# Allegro board SHT85-Demo.brd
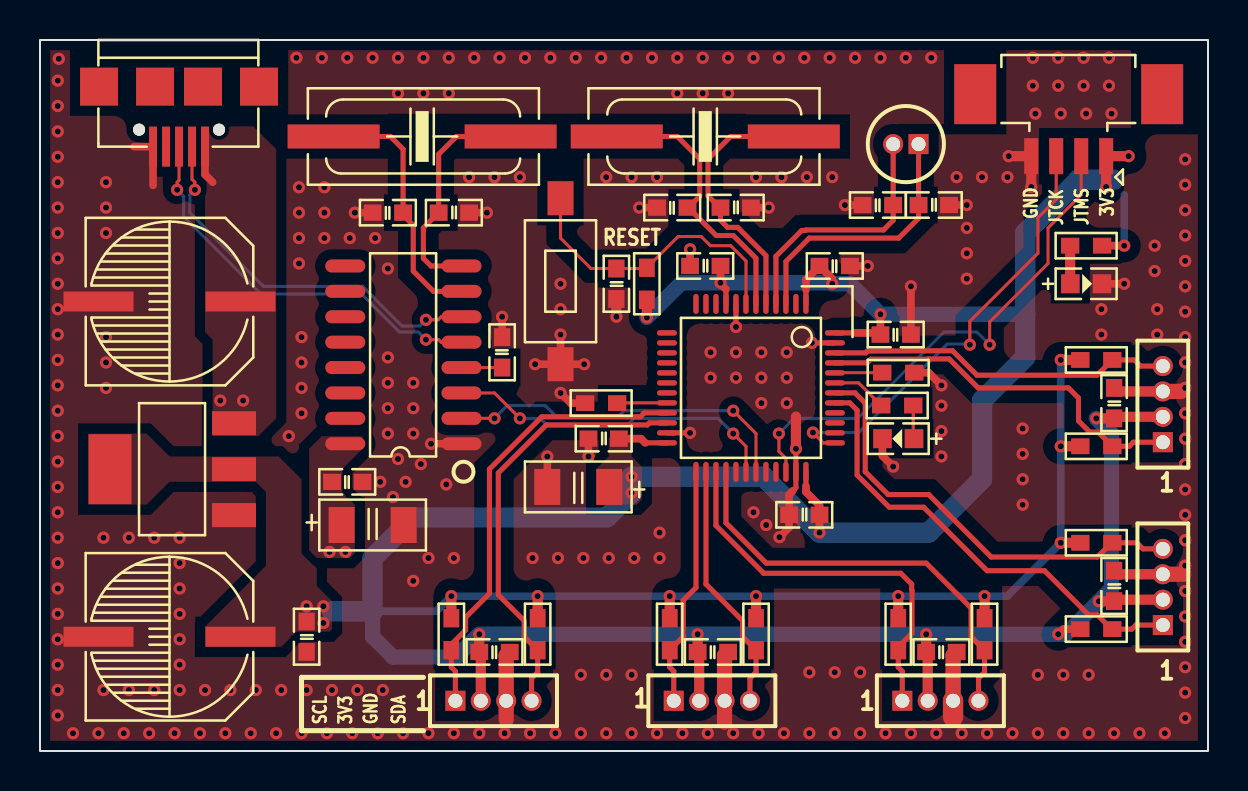
[diagram p0: board, top side]
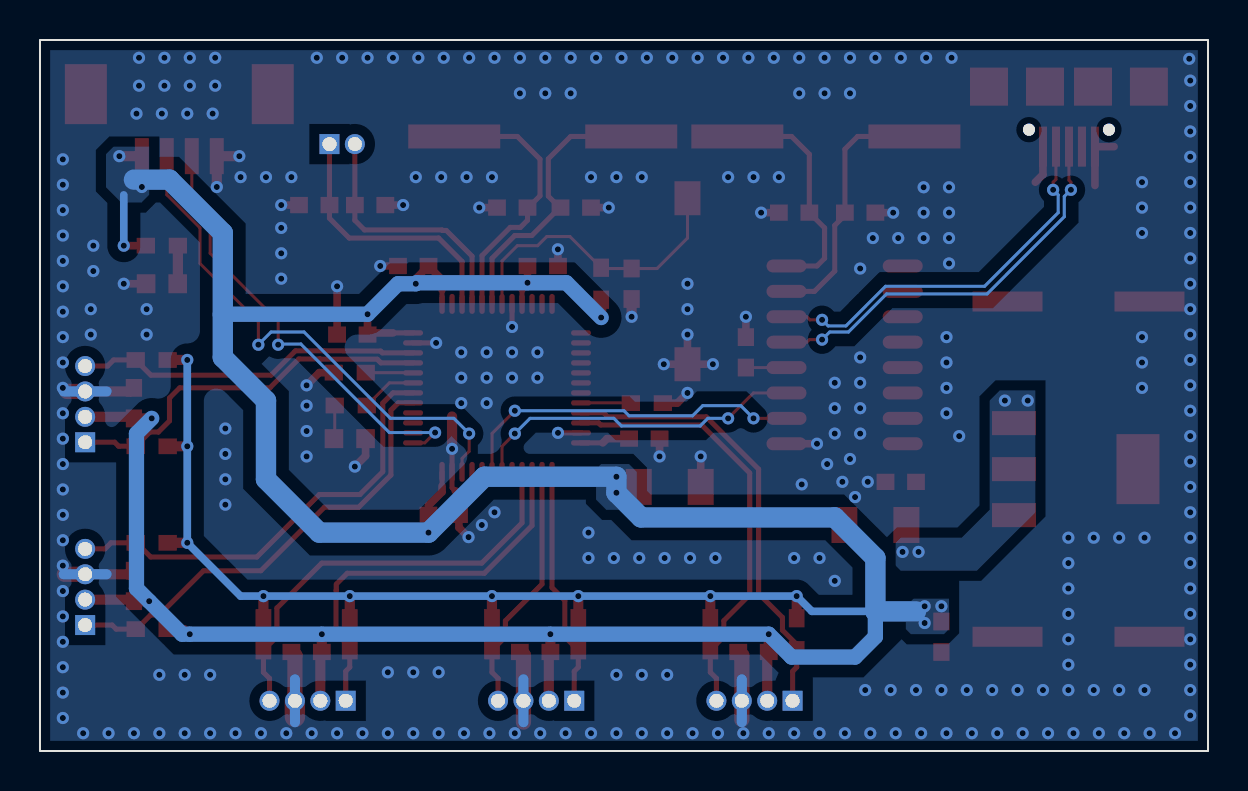
[diagram p1: board, bottom side, seen from below]

Outline 58.42 x 35.56 mm; copper layers: TOP, BOTTOM. Coordinates in mm from the lower left corner of the outline.
Outline path: rectangle 0,0 58.42,35.56

## Placement (name value [footprint] x y rotation side)
C1  0.1uF  [C0603]  28.83 23.37 90 top
C2  22pF  [C0603]  34.8 27.18 180 top
C3  22pF  [C0603]  31.62 27.18 0 top
C4  10pF/NC  [C0603]  44.7 27.3 180 top
C5  10pF/NC  [C0603]  41.91 27.3 0 top
C6  0.1uF  [C0603]  53.72 8.26 90 top
C7  0.1uF  [C0603]  53.72 17.4 90 top
C8  0.1uF  [C0603]  22.73 4.95 0 top
C9  0.1uF  [C0603]  33.66 4.95 0 top
C10  0.1uF  [C0603]  45.09 4.95 0 top
C11  220uF  [C_SMD_8X10]  6.48 22.48 180 top
C12  220uF  [C_SMD_8X10]  6.48 5.71 180 top
C13  0.1uF  [C0603]  13.34 5.71 90 top
C14  0.1uF  [C0603]  33.27 24.26 180 top
C15  0.1uF  [C0603]  39.75 24.26 0 top
C16  0.1uF  [C0603]  42.8 20.83 0 top
C17  0.1uF  [C0603]  38.23 11.81 180 top
C18  0.1uF  [C0603]  28.19 15.62 180 top
C19  10uF  [TA3216]  26.92 13.21 180 top
C24  10uF  [TA3216]  16.64 11.3 0 top
C25  0.1uF  [C0603]  15.37 13.46 0 top
C26  103  [C0603]  23.11 19.94 270 top
C27  22pF  [C0603]  17.4 26.92 0 top
C28  22pF  [C0603]  20.7 26.92 180 top
D1  LED  [LED0603]  42.93 15.62 180 top
D2  LED  [LED0603]  52.32 23.37 0 top
J1  SLAVE0_CON  [SIP-4-1R27]  56.16 6.3 90 top
J2  SLAVE1_CON  [SIP-4-1R27]  56.16 15.44 90 top
J3  SLAVE2_CON  [SIP-4-1R27]  20.78 2.51 0 top
J4  SLAVE3_CON  [SIP-4-1R27]  31.7 2.51 0 top
J5  SLAVE4_CON  [SIP-4-1R27]  43.13 2.51 0 top
J6  SWD  [1_25_PWT_4P]  51.38 32.48 180 top
KEY1  RESET  [BUTTON_2P_SMD]  26.04 23.5 90 top
R1  10K  [R0603]  42.93 18.92 0 top
R2  10K  [R0603]  30.35 23.37 90 top
R3  10K  [R0603]  28.07 17.4 180 top
R4  4K7  [R0603]  52.83 10.41 0 top
R5  4K7  [R0603]  52.83 6.1 0 top
R6  4K7  [R0603]  52.83 19.56 0 top
R7  4K7  [R0603]  52.83 15.24 0 top
R8  4K7  [R0603]  24.89 5.84 270 top
R9  4K7  [R0603]  20.57 5.84 270 top
R10  4K7  [R0603]  35.81 5.84 270 top
R11  4K7  [R0603]  31.5 5.84 270 top
R12  4K7  [R0603]  47.24 5.84 270 top
R13  4K7  [R0603]  42.93 5.84 270 top
R14  1K  [R0603]  42.88 17.28 0 top
R15  1K  [R0603]  52.32 25.27 180 top
U1  STM32F103C8T6  [LQFP-48]  35.56 18.16 270 top
U2  AMS1117-3V3  [SOT-223]  6.6 14.1 90 top
U3  CH340G  [SOIC-16]  21.08 15.37 180 top
USB1  USB_B_MICRO  [USB-MICRO-5P]  8.26 30.23 180 top
X1  8MHz  [CRY_HC_49U_SMD]  33.27 30.73 180 top
X2  32.768K  [32R768K_DIP]  43.94 30.35 180 top
X3  12MHz  [CRY_HC_49U_SMD]  19.11 30.73 0 top

## Library data of the parts
C1-C10 C13-C18 C25-C28 = CAP NP
C11 C12 = CAP POL
C19 C24 = CAP TAC
D1 D2 = LED
J1-J6 = 4 HEADER
KEY1 = KEY_2
R1-R15 = R
U1 = STM32F103C8T6
U2 = AMS1117-3V3
U3 = CH340G
USB1 = USB_B_MINI
X1-X3 = XTAL

## Footprints (pads in the part's own frame, mm; a bottom-side part is the same pattern mirrored in y, then rotated)
1_25_PWT_4P
  rect 2.1x3 smd: (-4.742,-0.369) (4.608,-0.369)
  rect 0.7x1.8 smd: 1(-1.94,2.731) 2(-0.694,2.731) 3(0.558,2.731) 4(1.808,2.731)
32R768K_DIP
  rect 1x1 hole 0.7: 1(0,0)
  round 1 hole 0.7: 2(1.27,0)
BUTTON_2P_SMD
  rect 1.7x1.3 smd: 1(-4.15,0) 2(4.15,0)
C0603
  rect 0.889x0.813 smd: 1(-0.762,0) 2(0.762,0)
C_SMD_8X10
  rect 3.5x1 smd: 1(-3.55,0) 2(3.55,0)
CRY_HC_49U_SMD
  rect 4.6x1.2 smd: 1(-4.428,0) 2(4.428,0)
LED0603
  rect 0.93x0.95 smd: 1(-0.79,0) 2(0.79,0)
LQFP-48
  oval 1x0.27 smd: 1(-4.2,2.75) 2(-4.2,2.25) 3(-4.2,1.75) 4(-4.2,1.25) 5(-4.2,0.75) 6(-4.2,0.25) 7(-4.2,-0.25) 8(-4.2,-0.75) 9(-4.2,-1.25) 10(-4.2,-1.75) 11(-4.2,-2.25) 12(-4.2,-2.75) 25(4.2,-2.75) 26(4.2,-2.25) 27(4.2,-1.75) 28(4.2,-1.25) 29(4.2,-0.75) 30(4.2,-0.25) 31(4.2,0.25) 32(4.2,0.75) 33(4.2,1.25) 34(4.2,1.75) 35(4.2,2.25) 36(4.2,2.75)
  oval 0.27x1 smd: 13(-2.75,-4.2) 14(-2.25,-4.2) 15(-1.75,-4.2) 16(-1.25,-4.2) 17(-0.75,-4.2) 18(-0.25,-4.2) 19(0.25,-4.2) 20(0.75,-4.2) 21(1.25,-4.2) 22(1.75,-4.2) 23(2.25,-4.2) 24(2.75,-4.2) 37(2.75,4.2) 38(2.25,4.2) 39(1.75,4.2) 40(1.25,4.2) 41(0.75,4.2) 42(0.25,4.2) 43(-0.25,4.2) 44(-0.75,4.2) 45(-1.25,4.2) 46(-1.75,4.2) 47(-2.25,4.2) 48(-2.75,4.2)
R0603
  rect 0.914x0.787 smd: 1(-0.8,0) 2(0.8,0)
SIP-4-1R27
  rect 1x1 hole 0.7: 1(0,0)
  round 1 hole 0.7: 2(1.27,0) 3(2.54,0) 4(3.81,0)
SOIC-16
  oval 2x0.65 smd: 1(0,0) 2(0,-1.27) 3(0,-2.54) 4(0,-3.81) 5(0,-5.08) 6(0,-6.35) 7(0,-7.62) 8(0,-8.89) 9(5.813,-8.89) 10(5.813,-7.62) 11(5.813,-6.35) 12(5.813,-5.08) 13(5.813,-3.81) 14(5.813,-2.54) 15(5.813,-1.27) 16(5.813,0)
SOT-223
  rect 1.2x2.2 smd: 1(-2.3,-3.1) 2(0,-3.1) 3(2.3,-3.1)
  rect 3.5x2.15 smd: 4(0,3.1)
TA3216
  rect 1.3x1.8 smd: 1(-1.55,0) 2(1.55,0)
USB-MICRO-5P
  rect 1.9x1.9 smd: (-2.7,-3) (0.1,-3) (2.5,-3) (5.3,-3)
  round 0.6 hole 0.6 unplated: (-0.7,-0.85) (3.3,-0.85)
  rect 0.4x2 smd: 1(0,0) 2(0.65,0) 3(1.3,0) 4(1.95,0) 5(2.6,0)

## Nets
GND: C1.1 C2.1 C3.1 C4.1 C5.1 C6.2 C7.2 C8.2 C9.2 C10.2 C11.2 C12.2 C13.1 C14.2 C15.2 C16.2 C17.2 C18.2 C19.2 C24.2 C25.2 C26.1 C27.1 C28.1 D1.2(K) D2.2(K) J1.3 J2.3 J3.3 J4.3 J5.3 J6.4 KEY1.1 R1.2 R3.2 U1.8(VSSA) U1.23(VSS_1) U1.35(VSS_2) U1.47(VSS_3) U2.1(GND) U3.1(GND) USB1.5(GND)
VCC_3V3: C6.1 C7.1 C8.1 C9.1 C10.1 C12.1 C13.2 C14.1 C15.1 C16.1 C17.1 C18.1 C19.1 J1.2 J2.2 J3.2 J4.2 J5.2 J6.1 R2.1 R4.1 R5.1 R6.1 R7.1 R8.1 R9.1 R10.1 R11.1 R12.1 R13.1 R15.1 U1.1(VBAT) U1.9(VDDA) U1.24(VDD_1) U1.36(VDD_2) U1.48(VDD_3) U2.2(OUT0) U2.4(OUT1)
VCC_USB: C11.1 C24.1 C25.1 U2.3(IN) U3.16(VCC) USB1.1(VCC)
D+: U3.5(D+) USB1.3(D+)
D-: U3.6(D-) USB1.2(D-)
I2C0_SCL: J1.1 R5.2 U1.41(PB5)
I2C0_SDA: J1.4 R4.2 U1.42(PB6)
I2C1_SCL: J2.1 R7.2 U1.45(PB8)
I2C1_SDA: J2.4 R6.2 U1.46(PB9)
I2C2_SCL: J3.1 R9.2 U1.21(PB10)
I2C2_SDA: J3.4 R8.2 U1.22(PB11)
I2C3_SCL: J4.1 R11.2 U1.25(PB12)
I2C3_SDA: J4.4 R10.2 U1.26(PB13)
I2C4_SCL: J5.1 R13.2 U1.27(PB14)
I2C4_SDA: J5.4 R12.2 U1.28(PB15)
LED0: R14.1 U1.43(PB7)
NRST: C1.2 KEY1.2 R2.2 U1.7(NRST)
OSC_IN: C2.2 U1.5(PD0-OSC_IN) X1.1(X1)
OSC_OUT: C3.2 U1.6(PD1) X1.2(X2)
RTC_OSCIN: C4.2 U1.3(PC14-OSC32_IN) X2.1(X1)
RTC_OSCOUT: C5.2 U1.4(PC15-OSC32_OUT) X2.2(X2)
SWCLK: J6.3 U1.37(PA14)
SWDIO: J6.2 U1.34(PA13)
USART1_RX: U1.31(PA10) U3.2(TXD)
USART1_TX: U1.30(PA9) U3.3(RXD)
N00282: R1.1 U1.44(BOOT0)
N02694: R3.1 U1.20(PB2)
N12358: D1.1(A) R14.2
N13133: D2.1(A) R15.2
N27803: C28.2 U3.8(XO) X3.2(X2)
N27807: C27.2 U3.7(XI) X3.1(X1)
N275633: C26.2 U3.4(V3)

Pads without a net: U1 2 10 11 12 13 14 15 16 17 18 19 29 32 33 38 39 40; U3 9 10 11 12 13 14 15; USB1 4

## Via types
v1: diameter 0.61, hole 0.305, TOP to BOTTOM, 327 vias

## Routing (per net, layer and track width the routed paths; a pad name or vN(x,y) marks a point on that pad's centre or on a via; arc(x,y) is an arc through that point)
GND: length 68.5
  TOP w0.254: U1.23 v1(32.51,15.91) ; U1.47 v1(38.61,20.41) ; 37.66,13.02 37.81,13.17 U1.35 v1(37.81,15.11) ; U1.8 v1(34.81,21.21)
  TOP w0.381: v1(36.99,10.7) 37.47,11.18 C17.2 37.47,12.83 37.66,13.02 ; C14.2 32.51,25.09 v1(32.52,25.09) ; C19.2 v1(25.37,14.73) ; v1(45.09,18.29) 44.45,18.92 R1.2 ; 5.66,28.29 USB1.5 4.7,30.23 ; KEY1.1 v1(26.04,20.83) ; KEY1.1 v1(24.77,19.34) ; KEY1.1 v1(27.22,19.34) ; C16.2 v1(43.56,23.24) ; C5.1 v1(40.26,27.3) ; C4.1 v1(46.35,27.3) ; C18.2 v1(27.43,14.73) ; C2.1 v1(36.45,27.18) ; D1.2 42.14,14.76 v1(42.67,14.22) ; v1(26.04,17.91) 26.54,17.4 R3.2 ; C27.1 v1(15.75,26.92) ; C28.1 v1(22.35,26.92) ; D2.2 v1(54.23,23.37) ; C3.1 v1(29.97,27.18) ; C26.1 v1(23.11,21.72) ; U3.1 v1(19.56,15.37) ; C15.2 v1(41.4,24.26)
  TOP w0.508: 53.72,9.02 53.9,8.84 J1.3 56.29,8.84 ; J2.3 53.9,17.98 C7.2 ; v1(49.58,28.21) J6.4 v1(48.45,29.75) ; C1.1 v1(28.83,21.72) ; v1(37.81,15.11) 37.81,16.73
  TOP w0.762: C10.2 45.67,4.78 J5.3 ; J2.3 57.07,17.98 ; C9.2 34.24,4.78 J4.3 34.24,1.45 ; 57.2,8.84 56.29,8.84 ; 23.32,1.57 J3.3 23.32,4.78 C8.2
  TOP w1.016: J5.3 45.67,1.7
  BOTTOM w0.508: 55.09,8.84 J1.3 57.23,8.84 ; 23.32,1.44 J3.3 23.32,3.58 ; 34.24,1.44 J4.3 34.24,3.58 ; 45.67,1.44 J5.3 45.67,3.58 ; 57.23,17.98 J2.3 55.09,17.98
  vias: v1(0.94,34.62) v1(0.89,33.53) v1(0.89,32.26) v1(0.89,30.99) v1(0.89,29.72) v1(0.89,28.45) v1(0.89,27.18) v1(0.89,25.91) v1(0.89,24.64) v1(0.89,23.37) v1(0.89,22.1) v1(0.89,20.83) v1(0.89,19.56) v1(0.89,18.29) v1(0.89,17.02) v1(0.89,15.75) v1(0.89,14.48) v1(0.89,13.21) v1(0.89,11.94) v1(0.89,10.67) v1(0.89,9.4) v1(0.89,8.13) v1(0.89,6.86) v1(0.89,5.59) v1(0.89,4.32) v1(0.89,3.05) v1(0.89,1.78) v1(1.65,0.89) v1(2.92,0.89) v1(3.17,10.67) v1(3.17,3.05) v1(3.3,28.45) v1(3.3,27.18) v1(3.3,25.91) v1(3.3,20.7) v1(3.3,19.43) v1(3.3,18.16) v1(4.19,0.89) v1(4.45,10.67) v1(4.45,3.05) v1(5.46,0.89) v1(5.71,10.67) v1(5.71,3.05) v1(6.73,0.89) v1(6.99,10.67) v1(6.99,9.4) v1(6.99,8.13) v1(6.99,6.86) v1(6.99,5.59) v1(6.99,4.32) v1(6.99,3.05) v1(8,0.89) v1(8.26,3.05) v1(9.27,0.89) v1(9.53,3.05) v1(10.54,0.89) v1(10.79,3.05) v1(11.81,0.89) v1(12.06,3.05) v1(12.45,15.75) v1(12.83,34.67) v1(12.95,28.19) v1(12.95,26.92) v1(12.95,25.65) v1(12.95,24.38) v1(13.08,20.7) v1(13.08,19.43) v1(13.08,18.16) v1(13.08,16.89) v1(13.08,0.89) v1(13.34,3.05) v1(14.1,34.67) v1(14.22,28.19) v1(14.22,26.92) v1(14.22,25.65) v1(14.35,0.89) v1(14.61,3.05) v1(15.37,34.67) v1(15.49,25.65) v1(15.62,0.89) v1(15.88,3.05) v1(16.64,34.67) v1(16.76,25.65) v1(16.89,0.89) v1(17.02,13.46) v1(17.14,3.05) v1(17.4,24.13) v1(17.4,19.68) v1(17.4,18.41) v1(17.4,17.14) v1(17.4,15.88) v1(17.65,12.7) v1(17.91,34.67) v1(17.91,32.89) v1(17.91,14.61) v1(18.16,0.89) v1(18.29,13.46) v1(18.67,18.41) v1(18.67,17.14) v1(18.67,15.88) v1(18.67,8.51) v1(19.05,14.35) v1(19.18,34.67) v1(19.18,32.89) v1(19.43,9.65) v1(19.43,0.89) v1(20.32,13.34) v1(20.45,34.67) v1(20.45,32.89) v1(20.7,9.65) v1(20.7,0.89) v1(21.46,28.7) v1(21.72,34.67) v1(21.97,0.89) v1(22.73,28.7) v1(22.99,34.67) v1(23.24,0.89) v1(24,28.7) v1(24.26,34.67) v1(24.51,0.89) v1(24.64,9.65) v1(25.53,34.67) v1(25.78,0.89) v1(25.91,9.65) v1(26.04,23.37) v1(26.04,22.1) v1(26.8,34.67) v1(27.05,3.81) v1(27.05,0.89) v1(27.18,9.65) v1(28.07,34.67) v1(28.32,28.7) v1(28.32,3.81) v1(28.32,0.89) v1(28.45,9.65) v1(29.34,34.67) v1(29.59,28.7) v1(29.59,3.81) v1(29.59,0.89) v1(29.72,9.65) v1(30.61,34.67) v1(30.86,28.7) v1(30.86,0.89) v1(30.99,10.92) v1(30.99,9.65) v1(31.88,34.67) v1(31.88,32.89) v1(32.13,0.89) v1(33.15,34.67) v1(33.15,32.89) v1(33.4,0.89) v1(33.54,19.94) v1(33.54,18.67) v1(34.42,34.67) v1(34.42,32.89) v1(34.67,0.89) v1(34.81,19.94) v1(34.81,18.67) v1(35.69,34.67) v1(35.69,11.94) v1(35.81,28.7) v1(35.94,0.89) v1(36.08,19.94) v1(36.08,18.67) v1(36.08,17.4) v1(36.32,11.3) v1(36.96,34.67) v1(37.08,28.7) v1(37.21,0.89) v1(37.35,19.94) v1(37.35,18.67) v1(37.35,17.4) v1(38.23,34.67) v1(38.35,28.7) v1(38.48,3.94) v1(38.48,0.89) v1(39.5,34.67) v1(39.62,28.7) v1(39.75,3.94) v1(39.75,0.89) v1(40.77,34.67) v1(41.02,3.94) v1(41.02,0.89) v1(42.04,34.67) v1(42.29,0.89) v1(43.31,34.67) v1(43.56,0.89) v1(44.58,34.67) v1(44.83,0.89) v1(45.09,17.27) v1(45.09,16) v1(45.09,14.73) v1(45.85,28.7) v1(46.1,0.89) v1(46.35,26.16) v1(46.35,24.89) v1(46.35,23.62) v1(47.12,28.7) v1(47.37,0.89) v1(48.39,28.7) v1(48.64,0.89) v1(49.15,16.13) v1(49.15,14.86) v1(49.15,13.59) v1(49.15,12.32) v1(49.66,34.67) v1(49.66,33.27) v1(49.78,31.88) v1(49.91,3.81) v1(49.91,0.89) v1(50.93,34.67) v1(50.93,33.27) v1(51.05,31.88) v1(51.18,3.81) v1(51.18,0.89) v1(52.2,34.67) v1(52.2,33.27) v1(52.32,31.88) v1(52.45,3.81) v1(52.45,0.89) v1(53.09,22.1) v1(53.09,20.83) v1(53.47,34.67) v1(53.47,33.27) v1(53.59,31.88) v1(53.72,0.89) v1(54.99,0.89) v1(55.75,25.27) v1(55.75,24) v1(55.88,22.1) v1(55.88,20.83) v1(56.26,0.89) v1(57.28,29.59) v1(57.28,28.32) v1(57.28,27.05) v1(57.28,25.78) v1(57.28,24.51) v1(57.28,23.24) v1(57.28,21.97) v1(57.28,20.7) v1(57.28,19.43) v1(57.28,18.16) v1(57.28,16.89) v1(57.28,15.62) v1(57.28,14.35) v1(57.28,13.08) v1(57.28,11.81) v1(57.28,10.54) v1(57.28,9.27) v1(57.28,8) v1(57.28,6.73) v1(57.28,5.46) v1(57.28,4.19) v1(57.28,2.92) v1(57.28,1.65)
VCC_3V3: length 221.7
  TOP w0.254: 30.27,15.41 U1.24 ; 38.31,13.25 U1.36 ; 38.31,23.07 U1.1 ; U1.9 34.31,23.09 ; U1.48 40.77,20.91
  TOP w0.381: v1(50.93,5.84) 51.18,6.1 R5.1 ; 38.31,13.25 38.31,12.95 38.99,12.28 C17.1 v1(38.99,10.92) ; R15.1 v1(54.23,25.27) ; C14.1 v1(34.04,23.42) 34.04,23.37 34.31,23.09 ; v1(39.62,23.37) 39.62,23.62 C15.1 38.31,23.58 38.31,23.07 ; 40.77,20.91 41.95,20.91 C16.1 v1(42.04,21.84) ; 30.27,15.41 30.06,15.62 C18.1
  TOP w0.508: J4.2 32.97,4.88 C9.1 v1(32.89,5.84) ; v1(54.45,29.75) J6.1 v1(53.33,28.21) ; J1.2 53.92,7.57 53.85,7.49 C6.1 v1(52.96,7.49) ; R8.1 v1(24.89,7.75) ; v1(44.32,5.84) C10.1 44.4,4.88 J5.2 ; J3.2 22.05,4.88 C8.1 v1(21.97,5.84) ; R11.1 v1(31.5,7.75) ; R13.1 v1(42.93,7.75) ; R9.1 v1(20.57,7.75) ; R4.1 v1(51.05,10.41) ; R6.1 v1(51.05,19.56) ; R10.1 v1(35.81,7.75) ; J2.2 53.8,16.71 C7.1 v1(52.83,16.64) ; R12.1 v1(47.24,7.75) ; R2.1 v1(30.35,21.68) ; R7.1 v1(51.05,15.24)
  BOTTOM w0.381: v1(54.23,25.27) 54.23,27.81 ; 16.64,6.99 19.81,6.99 v1(20.57,7.75) v1(24.89,7.75) v1(31.5,7.75) v1(35.81,7.75) v1(42.93,7.75) v1(47.24,7.75) 48.39,7.75 v1(51.05,10.41) v1(51.05,15.24) v1(51.05,19.56)
  BOTTOM w0.762: v1(52.83,16.64) 53.59,15.88 53.59,8.13 v1(52.96,7.49) 51.31,5.84 v1(50.93,5.84) v1(44.32,5.84) v1(32.89,5.84) v1(21.97,5.84) 20.83,4.7 17.65,4.7 16.64,5.71 16.64,6.99 ; 49.28,21.84 v1(42.04,21.84) 40.51,23.37 v1(39.62,23.37) 39.57,23.42 v1(34.04,23.42) 32.09,23.42 v1(30.35,21.68)
  BOTTOM w1.016: 14.61,6.99 16.64,6.99 16.64,9.65 18.67,11.68 28.36,11.68 v1(29.59,12.92) v1(29.59,13.72) 36.2,13.72 v1(38.99,10.92) 44.45,10.92 47.12,13.59 47.12,17.53 49.28,19.68 49.28,25.91 51.94,28.57 53.72,28.57
  vias: v1(13.34,7.24) v1(14.17,7.24) v1(14.17,6.4)
VCC_USB: length 1.9
  TOP w0.381: USB1.1 8.26,28.83 8.64,28.45
  vias: v1(9.02,17.53) v1(10.16,17.53) v1(14.48,9.96) v1(15.28,9.96)
D+: length 20.2
  TOP w0.152: v1(6.86,28.07) 6.86,28.45 6.96,28.55 USB1.3 ; v1(19.3,20.57) 19.94,20.57 20.07,20.45 U3.5
  BOTTOM w0.152: v1(6.86,28.07) 7.19,27.74 7.19,26.72 11.05,22.86 16.08,22.86 17.98,20.95 18.92,20.95 v1(19.3,20.57)
D-: length 19.6
  TOP w0.152: v1(19.3,21.56) 19.91,21.56 20.07,21.72 U3.6 ; USB1.2 7.61,28.59 7.75,28.45 v1(7.75,28.07)
  BOTTOM w0.152: v1(19.3,21.56) 19,21.26 18.11,21.26 16.13,23.24 11.18,23.24 7.49,26.92 7.49,27.81 v1(7.75,28.07)
I2C0_SCL: length 23.1
  TOP w0.254: J1.1 54.81,6.3 54.61,6.1 R5.2 53.59,6.1 52.88,6.81 52.45,6.81 50.24,9.02 47.37,9.02 44.2,12.19 42.48,12.19 40.87,13.8 40.87,17.04 40.5,17.41 U1.41
I2C0_SDA: length 22.2
  TOP w0.254: U1.42 40.76,17.91 41.27,17.4 41.27,13.97 42.42,12.83 44.45,12.83 47.57,9.7 52.88,9.7 53.59,10.41 R4.2 54.86,10.41 55.17,10.11 J1.4
I2C1_SCL: length 19
  TOP w0.254: J2.1 54.69,15.44 54.48,15.24 R7.2 52.92,15.95 52.5,15.95 51.94,16.51 51.94,17.65 51.44,18.16 46.92,18.16 45.48,19.61 44.42,19.61 44.41,19.6 41.55,19.6 41.46,19.5 41.37,19.41 U1.45
I2C1_SDA: length 17.4
  TOP w0.254: J2.4 55.04,19.25 54.74,19.56 R6.2 52.87,18.8 46.86,18.8 45.64,20.02 44.25,20.02 41.38,20 41.29,19.91 U1.46
I2C2_SCL: length 22.5
  TOP w0.254: J3.1 20.78,3.99 20.57,4.19 R9.2 20.57,5.33 21.29,6.05 21.29,6.68 22.48,7.87 22.48,14.1 25.1,16.71 30.03,16.71 30.23,16.91 U1.21
I2C2_SDA: length 21.8
  TOP w0.254: J3.4 24.59,3.63 24.89,3.94 R8.2 24.22,5.71 24.22,6.52 22.92,7.81 22.92,13.91 25.32,16.31 30.38,16.31 30.48,16.41 U1.22
I2C3_SCL: length 12.1
  TOP w0.254: U1.25 32.81,8.17 32.17,7.53 32.17,5.71 R11.2 31.5,4.19 31.7,3.99 J4.1
I2C3_SDA: length 12.6
  TOP w0.254: J4.4 35.51,3.63 35.81,3.94 R10.2 35.14,5.71 35.14,6.52 33.31,8.35 U1.26
I2C4_SCL: length 19.9
  TOP w0.254: J5.1 43.13,3.99 42.93,4.19 R13.2 42.93,5.21 43.61,5.89 43.61,8.03 43.6,8.04 43.6,8.34 43.05,8.89 36.2,8.89 33.81,11.28 U1.27
I2C4_SDA: length 21.6
  TOP w0.254: U1.28 34.31,11.41 36.32,9.4 44.32,9.4 46.57,7.15 46.57,5.71 R12.2 47.24,3.94 46.94,3.63 J5.4
LED0: length 2.8
  TOP w0.152: R14.1 40.95,18.41 U1.43
NRST: length 15.2
  TOP w0.152: KEY1.2 26.04,25.65 27.56,24.13 C1.2 30.31,24.13 R2.2 31.92,25.73 33.07,25.73 33.53,25.27 34.54,25.27 35.31,24.51 U1.7
OSC_IN: length 13.5
  TOP w0.254: X1.1 34.54,30.73 33.41,29.6 33.41,27.76 34,27.18 C2.2 34.04,26.54 34.39,26.19 34.9,26.19 36.31,24.78 U1.5
OSC_OUT: length 14
  TOP w0.254: 32.42,27.18 33.82,25.78 34.67,25.78 35.81,24.64 U1.6 ; 32.42,27.18 C3.2 ; 32.42,27.18 32.99,27.75 32.99,29.62 31.88,30.73 X1.2
RTC_OSCIN: length 13.4
  TOP w0.254: U1.3 37.31,24.48 38.48,25.65 42.95,25.65 43.94,26.64 C4.2 X2.1
RTC_OSCOUT: length 12.8
  TOP w0.254: X2.2 C5.2 42.67,26.54 42.19,26.06 38.31,26.06 38.29,26.04 38.1,26.04 36.81,24.74 U1.4
SWCLK: length 22.2
  TOP w0.152: v1(38.66,15.93) 39.17,15.41 U1.37 ; J6.3 50.83,27.59 49.91,26.67 49.91,24.89 46.51,21.49 v1(46.51,20.32)
  BOTTOM w0.152: v1(38.66,15.93) 40.94,15.93 45.37,20.35 46.47,20.35 v1(46.51,20.32)
SWDIO: length 26.3
  TOP w0.152: v1(36.96,15.88) 36.96,14.99 37.31,14.63 U1.34 ; v1(47.5,20.32) 47.5,21.46 50.42,24.38 50.42,26.16 52.08,27.82 J6.2
  BOTTOM w0.152: v1(36.96,15.88) 37.72,16.64 40.89,16.64 45.21,20.95 46.86,20.95 v1(47.5,20.32)
USART1_RX: length 17.7
  TOP w0.152: U1.31 35.81,15.88 v1(34.67,17.02) ; U3.2 v1(22.73,16.64)
  BOTTOM w0.152: v1(22.73,16.64) 23.37,17.27 25.27,17.27 25.78,16.76 28.96,16.76 29.21,17.02 v1(34.67,17.02)
USART1_TX: length 16.9
  TOP w0.152: U1.30 35.31,15.24 v1(34.67,15.88) ; U3.3 22.73,17.91 v1(24,16.64)
  BOTTOM w0.152: v1(34.67,15.88) 33.91,16.64 29.72,16.64 29.34,16.26 25.4,16.26 25.02,16.64 v1(24,16.64)
N00282: length 2.4
  TOP w0.152: U1.44 39.77,18.92 R1.1
N02694: length 2.5
  TOP w0.152: R3.1 28.88,17.41 U1.20
N12358: length 1.7
  TOP w0.152: D1.1 43.68,15.66 R14.2
N13133: length 1.9
  TOP w0.508: D2.1 51.52,23.38 R15.2
N27803: length 11.6
  TOP w0.254: X3.2 20.83,30.73 19.94,29.84 C28.2 19.18,26.16 19.18,24.64 19.56,24.26 U3.8
N27807: length 12.9
  TOP w0.254: X3.1 17.53,30.73 18.16,30.1 C27.2 18.16,26.8 18.67,26.29 18.67,24 19.68,22.99 U3.7
N275633: length 2
  TOP w0.152: U3.4 C26.2

## Copper pours and planes (outline as drawn; the poured copper is in the pictures)
GND on TOP: 0.51,0.51 0.51,35.05 57.91,35.05 57.91,0.51 ; 4 cut-outs
GND on BOTTOM: 0.51,0.51 0.51,35.05 57.91,35.05 57.91,0.51
VCC_3V3 on TOP: 27.81,12.32 27.81,14.1 28.45,14.73 28.45,16 29.46,16 29.59,15.88 29.59,14.73 30.1,14.22 30.1,12.57 29.84,12.32
VCC_3V3 on TOP: 6.48,14.73 5.33,15.88 2.41,15.88 2.41,12.32 5.33,12.32 6.48,13.46 10.79,13.46 11.3,12.95 11.3,9.27 8.26,6.22 8.26,5.21 12.06,5.21 12.83,5.97 14.48,5.97 14.61,6.1 14.61,7.49 13.84,8.26 13.84,9.14 13.08,9.91 13.08,13.59 11.94,14.73
VCC_3V3 on BOTTOM: 28.96,14.35 30.35,14.35 30.61,14.1 30.61,12.57 30.1,12.06 28.57,12.06 28.57,13.97
VCC_3V3 on BOTTOM: 52.96,30.23 54.74,30.23 55.12,29.84 55.12,28.19 54.36,27.43 53.34,27.43 52.96,27.81
VCC_3V3 on BOTTOM: 12.95,7.62 14.73,7.62 15.11,7.24 15.11,6.1 14.86,5.84 13.21,5.84 12.95,6.1
VCC_USB on TOP: 16.13,15.75 14.1,15.75 13.46,15.11 13.46,10.03 13.84,9.65 15.49,9.65 15.75,9.91 15.75,12.32 15.11,12.95 15.11,14.1 16.13,15.11
VCC_USB on TOP: 8.13,31.24 10.67,31.24 11.81,30.1 11.81,16.64 10.92,15.75 8.64,15.75 8.64,20.57 8.26,20.95 8.26,31.11
VCC_USB on BOTTOM: 8.64,18.03 10.41,18.03 10.92,17.53 10.92,12.06 12.32,10.67 15.37,10.67 15.62,10.41 15.62,9.27 15.37,9.02 11.56,9.02 8.64,11.94

## Text on the board
User.Comments: CR_SENSERS_1
Ref Des/Silkscreen Top: SCL | 3V3 | GND | SDA | JTCK | JTMS | RESET
NCLEGEND-1-2: FIGURE | SIZE | 12.0 | 27.56 | 23.62 | DRILL CHART: TOP to BOTTOM | ALL UNITS ARE IN MILS | PLATED | NON-PLATED | QTY | 327 | 22 | 2
